# EAGLE board smart hub v2 (EAGLE 9.6.2)
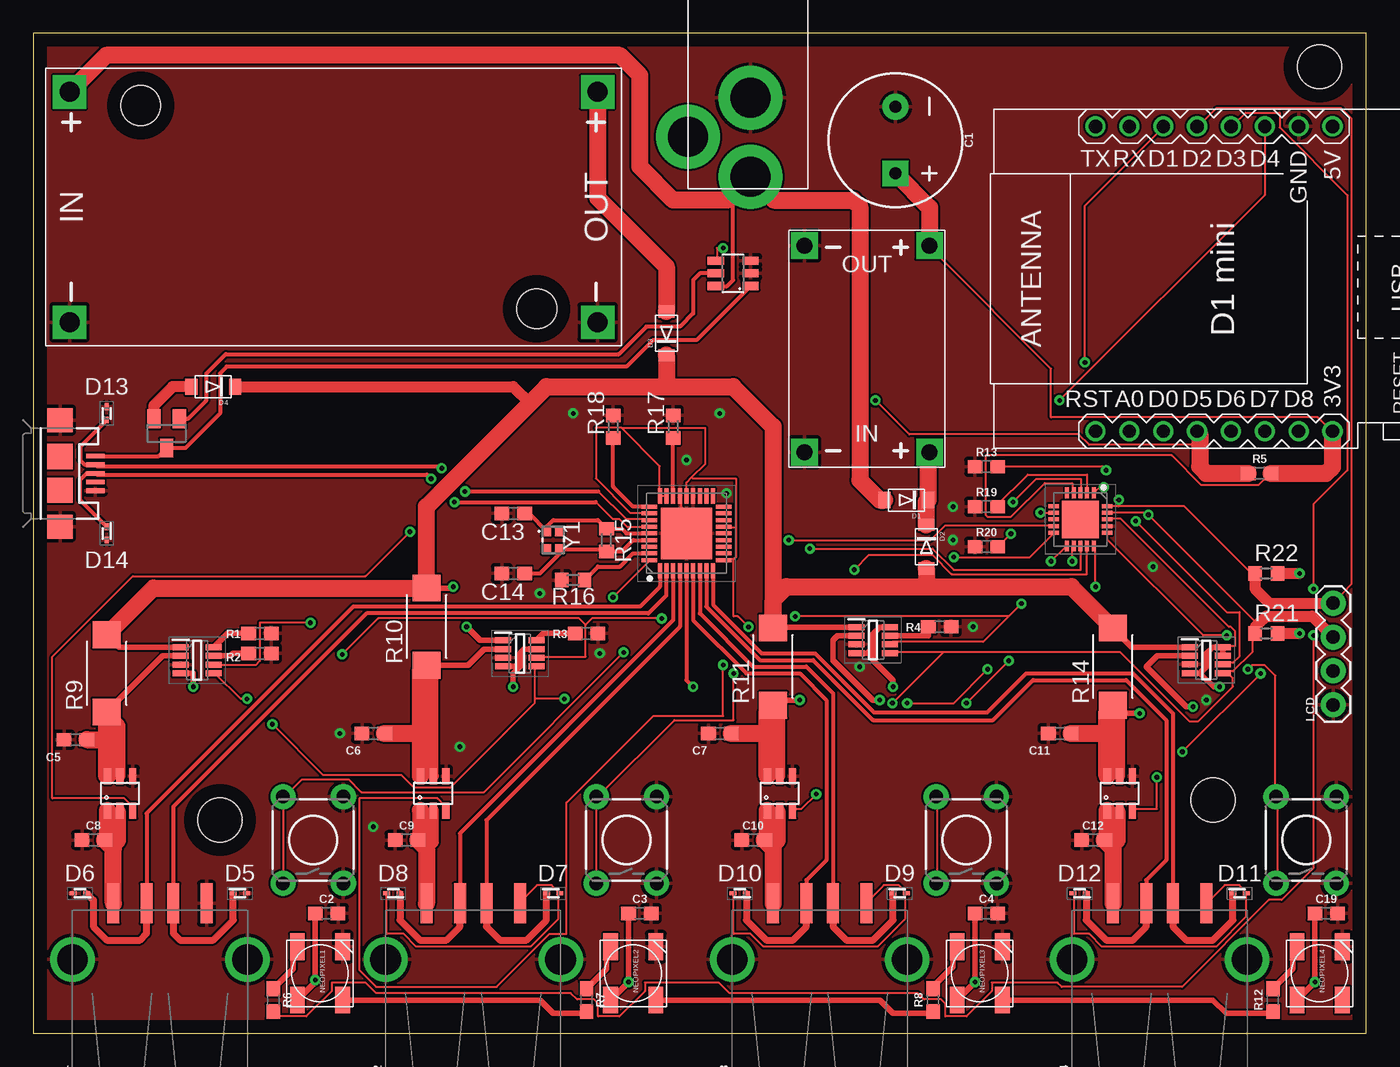
[diagram p0: board, top side]
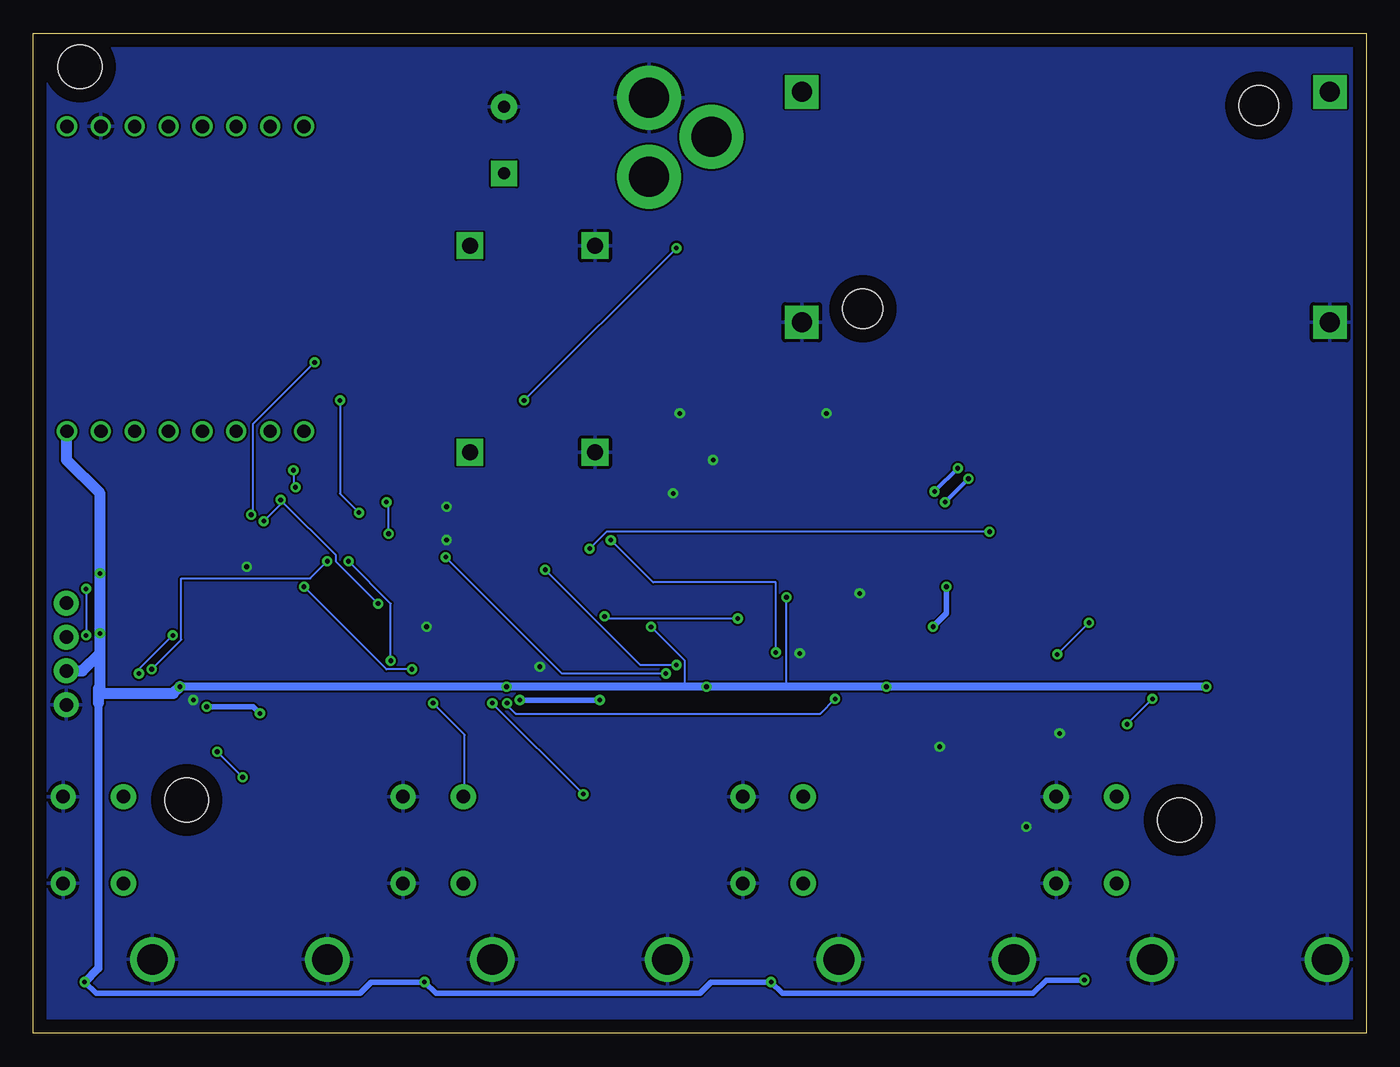
[diagram p1: board, bottom side, seen from below]

Size 100 x 75 mm. Coordinates in mm from the lower left corner, seen from the top.
Outline: 0,0 100,0 100,75 0,75 0,0
Copper layers (1*16): Top 0.035mm / dielectric 1.5mm / Bottom 0.035mm
Design rules "default": minimum track width 6mil, minimum drill 0.35mm, track to track 6mil, track to pad 6mil, pad to pad 6mil, via to via 6mil, smd to smd 6mil, copper to edge 40mil, drill to drill 6mil, minimum pad ring 10mil, minimum via ring 8mil, stop-mask expansion 4mil, vias tented up to drill 0mil, thermal gap 10mil
Holes 3.3 mm at 96.5,72.5 88.5,17.5 14,16

## Footprints (pad centres in the part's own frame; a part is rotated, then mirrored left to right if it is on the bottom)
CPOL-RADIAL-5MM-10MM-KIT = drill 0.9 pad 1.93 square: + 2.5,0 | drill 0.9 pad 1.93: - -2.5,0
0603 = smd 1.1 x 1: 1 -0.85,0; 2 0.85,0
C0603 = smd 1.1 x 1: 1 -0.85,0; 2 0.85,0
PJ-102A = drill 3 pad 4.8: RING 0.1,-3.39; RING_SW -4.6,-6.29; TIP 0.1,-9.29
SOD-123FL = smd 0.91 x 1.22: A 1.637,0; C -1.637,0
SODFL1006X40N = smd 0.51 x 0.32: 1 -0.5,0; 2 0.5,0
SOT65P280X145-8N = smd 1.2 x 0.45: 1 -1.25,0.975; 2 -1.25,0.325; 3 -1.25,-0.325; 4 -1.25,-0.975; 5 1.25,-0.975; 6 1.25,-0.325; 7 1.25,0.325; 8 1.25,0.975
QFN50P600X600X100-37N = smd 1.15 x 0.3: 1 -2.8,2; 2 -2.8,1.5; 3 -2.8,1; 4 -2.8,0.5; 5 -2.8,0; 6 -2.8,-0.5; 7 -2.8,-1; 8 -2.8,-1.5; 9 -2.8,-2; 19 2.8,-2; 20 2.8,-1.5; 21 2.8,-1; 22 2.8,-0.5; 23 2.8,0; 24 2.8,0.5; 25 2.8,1; 26 2.8,1.5; 27 2.8,2 | smd 0.3 x 1.15: 10 -2,-2.8; 11 -1.5,-2.8; 12 -1,-2.8; 13 -0.5,-2.8; 14 0,-2.8; 15 0.5,-2.8; 16 1,-2.8; 17 1.5,-2.8; 18 2,-2.8; 28 2,2.8; 29 1.5,2.8; 30 1,2.8; 31 0.5,2.8; 32 0,2.8; 33 -0.5,2.8; 34 -1,2.8; 35 -1.5,2.8; 36 -2,2.8 | smd 3.85 x 3.85: 37 0,0
QFN50P400X400X100-21N = smd 0.8 x 0.3: 1 -2,1; 2 -2,0.5; 3 -2,0; 4 -2,-0.5; 5 -2,-1; 11 2,-1; 12 2,-0.5; 13 2,0; 14 2,0.5; 15 2,1 | smd 0.3 x 0.8: 6 -1,-2; 7 -0.5,-2; 8 0,-2; 9 0.5,-2; 10 1,-2; 16 1,2; 17 0.5,2; 18 0,2; 19 -0.5,2; 20 -1,2 | smd 2.8 x 2.8: 21 0,0
USB-A-S-NOSILK-FEMALE = smd 3 x 0.9: D+ 6.752,-1; D- 6.752,1; GND 6.752,-3.5; VBUS 6.752,3.5 | drill 2.311: SHLD1 2.54,-6.566; SHLD2 2.54,6.566
1X04 = drill 1.016 pad 1.88: 1 0,0; 2 2.54,0; 3 5.08,0; 4 7.62,0
TSOT23-6 = smd 0.62 x 1.22: 1 -0.95,-1.3; 2 0,-1.3; 3 0.95,-1.3; 4 0.95,1.3; 5 0,1.3; 6 -0.95,1.3
SK6812 = smd 2 x 1.1: 1 -2,1.7; 2 -2,-1.7; 3 2,-1.7; 4 2,1.7
R2512W = smd 2 x 2.1: 1 -2.896,0; 2 2.896,0
R0603 = smd 1 x 1.1: 1 -0.85,0; 2 0.85,0
TACTILE-PTH = drill 1.016 pad 1.88: 1 -3.251,2.261; 2 3.251,2.261; 3 -3.251,-2.261; 4 3.251,-2.261
WEMOS-D1-MINI = drill 1: JP1.1 -11.43,9.525; JP1.2 -11.43,6.985; JP1.3 -11.43,4.445; JP1.4 -11.43,1.905; JP1.5 -11.43,-0.635; JP1.6 -11.43,-3.175; JP1.7 -11.43,-5.715; JP1.8 -11.43,-8.255; JP2.1 11.43,9.525; JP2.2 11.43,6.985; JP2.3 11.43,4.445; JP2.4 11.43,1.905; JP2.5 11.43,-0.635; JP2.6 11.43,-3.175; JP2.7 11.43,-5.715; JP2.8 11.43,-8.255
SOT23 = smd 1 x 1.4: 1 -0.95,-1.1; 2 0.95,-1.1; 3 0,1.1
SOT23-6 = smd 0.55 x 1.2: 1 -0.95,-1.3; 2 0,-1.3; 3 0.95,-1.3; 4 0.95,1.3; 5 0,1.3; 6 -0.95,1.3
DC-DC-STEP-DOWN-LM2596 = drill 1.5 pad 2.5 square: IN+ -19.812,8.636; IN- -19.812,-8.636; OUT+ 19.812,8.636; OUT- 19.812,-8.636 | hole 3: -14.478,7.62; 15.24,-7.62
DC-DC-STEP-DOWN-MP2307 = drill 1.2 pad 2 square: IN+ -7.747,-4.699; IN- -7.747,4.699; OUT+ 7.747,-4.699; OUT- 7.747,4.699
USB-MICROB = smd 0.35 x 1.4: D+ 0,2.65; D- -0.65,2.65; GND 1.3,2.65; ID 0.65,2.65; VBUS -1.3,2.65 | smd 1.8 x 1.9: MT1 -4,0; MT2 4,0 | smd 1.9 x 1.9: P$1 -1.27,0; P$2 1.27,0
XRCGB24 = smd 0.75 x 0.7: 1 -0.675,-0.5; 2 0.675,-0.5; 3 0.675,0.5; 4 -0.675,0.5

## Placement (x,y rotation side)
C1  1000uf  [CPOL-RADIAL-5MM-10MM-KIT]  64.69,66.99 270 top
C2  0.1uF  [0603]  22,9 0 top
C3  0.1uF  [0603]  45.5,9 0 top
C4  0.1uF  [0603]  71.5,9 0 top
C5  4.7uF  [0603]  3.16,22.02 180 top
C6  4.7uF  [0603]  25.5,22.5 180 top
C7  4.7uF  [0603]  51.5,22.5 180 top
C8  0.1uF  [0603]  4.5,14.5 0 top
C9  0.1uF  [0603]  28,14.5 0 top
C10  0.1uF  [0603]  54,14.5 0 top
C11  4.7uF  [0603]  77,22.5 180 top
C12  0.1uF  [0603]  79.5,14.5 0 top
C13  18p  [C0603]  36,39 180 top
C14  18p  [C0603]  36,34.5 180 top
C19  0.1uF  [0603]  97,9 0 top
CN1  2.1MMJACKTHM  [PJ-102A]  53.71,73.54 0 top
D1  [SOD-123FL]  65.5,40 180 top
D2  [SOD-123FL]  67,36.5 270 top
D3  [SOD-123FL]  47.5,52.5 90 top
D4  [SOD-123FL]  13.5,48.5 180 top
D5  ESD9B  [SODFL1006X40N]  15.5,10.5 0 top
D6  ESD9B  [SODFL1006X40N]  3.5,10.5 180 top
D7  ESD9B  [SODFL1006X40N]  39,10.5 0 top
D8  ESD9B  [SODFL1006X40N]  27,10.5 180 top
D9  ESD9B  [SODFL1006X40N]  65,10.5 0 top
D10  ESD9B  [SODFL1006X40N]  53,10.5 180 top
D11  ESD9B  [SODFL1006X40N]  90.5,10.5 0 top
D12  ESD9B  [SODFL1006X40N]  78.5,10.5 180 top
D13  ESD9B3.3ST5G  [SODFL1006X40N]  5.5,46.5 90 top
D14  ESD9B3.3ST5G  [SODFL1006X40N]  5.5,37.5 270 top
IC1  INA219B  [SOT65P280X145-8N]  12.29,27.98 0 top
IC2  INA219B  [SOT65P280X145-8N]  36.5,28.5 0 top
IC3  INA219B  [SOT65P280X145-8N]  63,29.5 0 top
IC4  INA219B  [SOT65P280X145-8N]  88,28 0 top
IC5  USB2514B  [QFN50P600X600X100-37N]  49,37.5 90 top
IC6  MCP23008  [QFN50P400X400X100-21N]  78.55,38.54 270 top
J1  USB_A_SMT_FEMALE_NS  [USB-A-S-NOSILK-FEMALE]  9.5,3 90 top
J2  USB_A_SMT_FEMALE_NS  [USB-A-S-NOSILK-FEMALE]  33,3 90 top
J3  USB_A_SMT_FEMALE_NS  [USB-A-S-NOSILK-FEMALE]  59,3 90 top
J4  USB_A_SMT_FEMALE_NS  [USB-A-S-NOSILK-FEMALE]  84.5,3 90 top
LCD  [1X04]  97.52,24.64 90 top
LTC4412  LTC4412  [TSOT23-6]  52.5,57 90 top
NEOPIXEL1  SK6812NEOPIXEL5050  [SK6812]  21.5,4.5 90 top
NEOPIXEL2  SK6812NEOPIXEL5050  [SK6812]  45,4.5 90 top
NEOPIXEL3  SK6812NEOPIXEL5050  [SK6812]  71,4.5 90 top
NEOPIXEL4  SK6812NEOPIXEL5050  [SK6812]  96.5,4.5 90 top
R1  10k  [0603]  17,30 180 top
R2  10k  [0603]  17,28.5 180 top
R3  10k  [0603]  41.5,30 180 top
R4  10k  [0603]  68,30.5 180 top
R5  470k  [0603]  92,42 0 top
R6  470  [0603]  18,2.5 270 top
R7  27  [0603]  41.5,2.5 270 top
R8  27  [0603]  67.5,2.5 90 top
R9  0.1ohm 1% 2W  [R2512W]  5.5,27 90 top
R10  0.1ohm 1% 2W  [R2512W]  29.5,30.5 90 top
R11  0.1ohm 1% 2W  [R2512W]  55.5,27.5 90 top
R12  27  [0603]  93,2.5 90 top
R13  10k  [0603]  71.5,42.5 0 top
R14  0.1ohm 1% 2W  [R2512W]  81,27.5 90 top
R15  1M  [R0603]  43,37 270 top
R16  12k  [R0603]  40.5,34 0 top
R17  56k  [R0603]  48,45.5 90 top
R18  56k  [R0603]  43.5,45.5 90 top
R19  10k  [0603]  71.5,39.5 0 top
R20  10k  [0603]  71.5,36.5 0 top
R21  4.7k  [R0603]  92.5,30 0 top
R22  4.7k  [R0603]  92.5,34.5 0 top
S1  [TACTILE-PTH]  21,14.5 90 top
S2  [TACTILE-PTH]  44.5,14.5 90 top
S3  [TACTILE-PTH]  70,14.5 90 top
S4  [TACTILE-PTH]  95.5,14.5 90 top
U$1  WEMOS-D1-MINI  [WEMOS-D1-MINI]  89.22,56.59 90 top
U$2  SQ2303ES  [SOT23]  10,45 180 top
U$3  SIP32508  [SOT23-6]  6.5,18 0 top
U$4  SIP32508  [SOT23-6]  30,18 0 top
U$5  SIP32508  [SOT23-6]  56,18 0 top
U$6  LM2596  [DC-DC-STEP-DOWN-LM2596]  22.53,61.97 0 top
U$7  mini-360  [DC-DC-STEP-DOWN-MP2307]  62.55,51.33 90 top
U$8  SIP32508  [SOT23-6]  81.5,18 0 top
USBIN  USB-MICROB  [USB-MICROB]  2,42 270 top
Y1  XRCGB24M000F0L00R0  [XRCGB24]  39,37 270 top

## Library data of the parts
C1 = SparkFun-Capacitors; PROD_ID: CAP-09538
C2-C4 C19 = SparkFun-Capacitors; PROD_ID: CAP-08604
C5-C7 C11 = SparkFun-Capacitors; PROD_ID: CAP-08280
C8-C10 C12 = SparkFun-Capacitors; PROD_ID: CAP-00810
C13 C14 CN1 D1-D4 R9-R11 R14 R21 R22 = adafruit
D5-D14 = SamacSys_Parts; ARROW_PART_NUMBER: ESD9B3.3ST5G; ARROW_PRICE-STOCK: https://www.arrow.com/en/products/esd9b3.3st5g/on-semiconductor; DESCRIPTION: TVS ESD Suppressor 18KV SOD-923 ON Semiconductor ESD9B3.3ST5G Bi-Directional TVS Diode, 300mW peak, 2-Pin SOD-923; HEIGHT: 0.4mm; MANUFACTURER_NAME: ON Semiconductor; MANUFACTURER_PART_NUMBER: ESD9B3.3ST5G; MOUSER_PART_NUMBER: 863-ESD9B3.3ST5G; MOUSER_PRICE-STOCK: https://www.mouser.co.uk/ProductDetail/ON-Semiconductor/ESD9B33ST5G?qs=yU2N9dt%252BrfmXrPf3vhgUEA%3D%3D
IC1-IC4 = INA219BIDCNT; ARROW_PART_NUMBER: INA219BIDCNT; ARROW_PRICE-STOCK: https://www.arrow.com/en/products/ina219bidcnt/texas-instruments; DESCRIPTION: INA219BIDCNT, Intelligent Power Switch High Side Current Shunt, Power Monitor, 0.01A, 5.5V, 8-Pin, SOT-23; HEIGHT: 1.45mm; MANUFACTURER_NAME: Texas Instruments; MANUFACTURER_PART_NUMBER: INA219BIDCNT; MOUSER_PART_NUMBER: 595-INA219BIDCNT; MOUSER_PRICE-STOCK: https://www.mouser.co.uk/ProductDetail/Texas-Instruments/INA219BIDCNT?qs=1WmUhT%2FVMIMmEKxVjzYikA%3D%3D
IC5 = SamacSys_Parts; ARROW_PART_NUMBER: USB2514B-AEZC; ARROW_PRICE-STOCK: https://www.arrow.com/en/products/usb2514b-aezc/microchip-technology; DESCRIPTION: USB 2.0 Hub Controller 4-Port BC QFN36 Microchip USB2514B-AEZC, USB Controller, 480MBps, USB 2.0, 3.3 V, 36-Pin QFN; HEIGHT: 1mm; MANUFACTURER_NAME: Microchip; MANUFACTURER_PART_NUMBER: USB2514B-AEZC; MOUSER_PART_NUMBER: 886-USB2514B-AEZC; MOUSER_PRICE-STOCK: https://www.mouser.co.uk/ProductDetail/Microchip-Technology/USB2514B-AEZC?qs=pA5MXup5wxGEnK1%2F4ENYlA%3D%3D
IC6 = SamacSys_Parts; ARROW_PART_NUMBER: MCP23008-E/ML; ARROW_PRICE-STOCK: https://www.arrow.com/en/products/mcp23008-eml/microchip-technology; DESCRIPTION: 8-Bit I/O Port Expander I2C 1.7M QFN20EP Microchip MCP23008-E/ML, 8-channel 8bit I/O Expander 1.7MHz, I2C, 20-Pin QFN; HEIGHT: 1mm; MANUFACTURER_NAME: Microchip; MANUFACTURER_PART_NUMBER: MCP23008-E/ML; MOUSER_PART_NUMBER: 579-MCP23008-E/ML; MOUSER_PRICE-STOCK: https://www.mouser.co.uk/ProductDetail/Microchip-Technology/MCP23008-E-ML?qs=usxtMOJb1Rw9YcrGR8Z%252BbQ%3D%3D
J1-J4 = SparkFun-Connectors; PROD_ID: CONN-09520; SF_ID: PRT-09011
LCD = SparkFun-Connectors; PROD_ID: CONN-09696
LTC4412 NEOPIXEL1-NEOPIXEL4 U$2-U$5 U$8 = custom parts
R1-R4 R13 R19 R20 = SparkFun-Resistors; PROD_ID: RES-00824
R5 = SparkFun-Resistors; PROD_ID: RES-07858
R6-R8 R12 = SparkFun-Resistors; PROD_ID: RES-07869
R15 = resistor
R16-R18 = rcl; SPICEPREFIX: R
S1-S4 = SparkFun-Retired
U$1 U$6 U$7 = diy-modules
USBIN = SparkFun-Retired; PROD_ID: CONN-09505
Y1 = SamacSys_Parts; ARROW_PART_NUMBER: XRCGB24M000F0L00R0; ARROW_PRICE-STOCK: https://www.arrow.com/en/products/xrcgb24m000f0l00r0/murata-manufacturing; DESCRIPTION: Murata 24MHz Crystal +/-100ppm SMD 4-Pin 2 x 1.6 x 0.7mm; HEIGHT: mm; MANUFACTURER_NAME: Murata Electronics; MANUFACTURER_PART_NUMBER: XRCGB24M000F0L00R0; MOUSER_PART_NUMBER: 81-XRCGB24M000F0L0R0; MOUSER_PRICE-STOCK: https://www.mouser.com/Search/Refine.aspx?Keyword=81-XRCGB24M000F0L0R0

## Nets
1+: D5.1 IC5.2 J1.D+
1-: D6.1 IC5.1 J1.D-
2+: D7.1 IC5.4 J2.D+
2-: D8.1 IC5.3 J2.D-
3+: D9.1 IC5.7 J3.D+
3-: D10.1 IC5.6 J3.D-
3.3V: C1.+ C2.1 C3.1 C4.1 C19.1 IC1.4 IC2.4 IC2.7 IC3.4 IC3.8 IC4.4 IC4.7 IC4.8 IC5.5 IC5.10 IC5.15 IC5.23 IC5.26 IC5.27 IC5.29 IC5.36 IC6.4 IC6.18 LCD.2 NEOPIXEL1.1 NEOPIXEL2.1 NEOPIXEL3.1 NEOPIXEL4.1 R5.2 R21.2 R22.2 U$1.JP1.8 U$7.OUT+
4+: D11.1 IC5.9 J4.D+
4-: D12.1 IC5.8 J4.D-
5V: U$1.JP2.8
BUTTON1: IC6.9 S1.1 S1.2
BUTTON2: IC6.10 S2.1 S2.2
BUTTON3: IC6.11 S3.1 S3.2
BUTTON4: IC6.12 S4.1 S4.2
D_IN+: D14.1 IC5.31 USBIN.D+
D_IN-: D13.1 IC5.30 USBIN.D-
EN1: IC6.13 U$3.3
EN2: IC6.14 U$4.3
EN3: IC6.15 U$5.3
EN4: IC6.16 U$8.3
GND: C1.- C2.2 C3.2 C4.2 C5.2 C6.2 C7.2 C8.1 C9.1 C10.1 C11.2 C12.1 C13.2 C14.2 C19.2 CN1.RING D5.2 D6.2 D13.2 D14.2 IC1.3 IC2.3 IC3.3 IC4.3 IC5.22 IC5.24 IC5.37 IC6.17 J1.GND J1.SHLD1 J1.SHLD2 J2.SHLD1 J2.SHLD2 J3.SHLD1 J3.SHLD2 J4.SHLD1 J4.SHLD2 LCD.1 LTC4412.2 LTC4412.3 NEOPIXEL1.3 NEOPIXEL2.3 NEOPIXEL3.3 NEOPIXEL4.3 R1.1 R2.1 R3.1 R4.1 R13.1 R16.1 R17.2 R18.2 R19.1 R20.1 S1.3 S1.4 S2.3 S2.4 S3.3 S3.4 S4.3 S4.4 U$1.JP2.7 U$3.4 U$4.4 U$5.4 U$6.IN- U$6.OUT- U$7.IN- U$7.OUT- U$8.4 USBIN.GND USBIN.MT1 USBIN.MT2
GND1: D7.2 D8.2 J2.GND
GND2: D9.2 D10.2 J3.GND
GND3: D11.2 D12.2 J4.GND
INTERUPT: IC6.7 U$1.JP2.6
N$1: CN1.TIP D1.A LTC4412.6 U$6.IN+
N$2: D1.C D2.C U$7.IN+
N$3: D4.A U$2.2
N$4: D3.A U$6.OUT+
N$5: LTC4412.5 U$2.1
N$6: NEOPIXEL2.4 R7.1
N$7: LTC4412.1 U$2.3 USBIN.VBUS
N$8: NEOPIXEL3.4 R8.2
N$9: NEOPIXEL1.2 R7.2
N$10: NEOPIXEL2.2 R8.1
N$11: C5.1 IC1.2 R9.1 U$3.5 U$3.6
N$12: C6.1 IC2.2 R10.1 U$4.5 U$4.6
N$13: IC3.7 R4.2
N$14: IC2.8 R3.2
N$15: IC1.8 R1.2
N$16: IC1.7 R2.2
N$17: NEOPIXEL1.4 R6.1
N$18: NEOPIXEL4.4 R12.2
N$19: C7.1 IC3.2 R11.1 U$5.5 U$5.6
N$20: NEOPIXEL3.2 R12.1
N$21: C10.2 J3.VBUS U$5.1 U$5.2
N$22: C9.2 J2.VBUS U$4.1 U$4.2
N$23: IC6.1 R13.2
N$24: IC6.2 R19.2
N$25: C11.1 IC4.2 R14.1 U$8.5 U$8.6
N$26: C12.2 J4.VBUS U$8.1 U$8.2
N$35: C13.1 IC5.32 R15.1 Y1.1
N$36: C14.1 IC5.33 R15.2 Y1.3
N$37: IC5.25 R17.1
N$38: IC5.28 R18.1
N$39: IC5.35 R16.2
N$40: IC6.3 R20.2
N$41: C8.2 J1.VBUS U$3.1 U$3.2
NEOPIXEL: R6.2 U$1.JP2.5
POWER_SENSE: LTC4412.4 R5.1 U$1.JP1.4
SCL: IC1.5 IC2.5 IC3.5 IC4.5 IC6.19 LCD.3 R21.1 U$1.JP2.3
SDA: IC1.6 IC2.6 IC3.6 IC4.6 IC6.20 LCD.4 R22.1 U$1.JP2.4
USB_SUPPLY: D2.A D3.C D4.C IC1.1 IC2.1 IC3.1 IC4.1 R9.2 R10.2 R11.2 R14.2

## Tracks (layer width: path | path; a pad name or v marks a point on that pad's centre or on a via)
1+
  Top 0.305: J1.D+ 10.5,17 25,31.5 46.15,31.5 47.5,32.85 IC5.2
  Top 0.508: J1.D+ 10.5,7.5 11,7 13.5,7 15,8.5 D5.1
1-
  Top 0.305: IC5.1 47,33.5 45.5,32 24,32 8.5,16.5 8.5,9
  Top 0.508: D6.1 4.5,10 4.5,8 5.5,7 8,7 8.5,7.5 8.5,9 J1.D-
2+
  Top 0.305: IC5.4 48.5,30.5 34,16 34,9.5
  Top 0.508: J2.D+ 34,9.5 34,8 35,7 37,7 38.5,8.5 D7.1
2-
  Top 0.305: IC5.3 48,31 32,15 32,9.5
  Top 0.508: D8.1 27.5,8.5 29,7 31,7 32,8 32,9.5 J2.D-
3+
  Top 0.305: IC5.7 50,31.5 54,27.5 58,27.5 60,25.5 J3.D+
  Top 0.508: J3.D+ 60,8 61,7 63,7 64.5,8.5 D9.1
3-
  Top 0.305: IC5.6 49.5,31 53.5,27 57.5,27 59.5,25 59.5,13 58,11.5 58,9
  Top 0.508: D10.1 53.5,8.5 55,7 57,7 58,8 58,9 J3.D-
3.3V  (via drill 0.35)
  Top 0.152: 52.55,35.56 51.91,35.56 IC5.10 | 52.55,35.56 52.7,35.72 52.7,37.94 | 52.7,37.94 51.91,37.94 IC5.15 | 44.13,45.4 42.2,45.4 42.2,41.62 44.77,39.05 46.2,39.05 IC5.29 | 44.13,45.4 46.99,42.55 46.99,40.32 IC5.27 47.15,40.32 47.47,40.32 IC5.26 | 49.4,41.7 50.4,42.7 50.4,45.4 44.13,45.4 | 49.4,41.7 49,41.3 IC5.23 | 52.7,37.94 52.7,41.62 49.47,41.62 49.4,41.7 | IC6.18 80.64,38.58 81.6,38.58 89.69,30.48 89.85,30.48 90.17,30.16 90.17,29.05 89.38,29.05 IC4.8 | IC6.4 77.95,40.64 77.95,41.27 75.88,41.27 73.34,38.73 71.6,38.73 71.44,38.89 71.44,43.34 85.41,43.34 87.63,41.12 91.92,41.12 92.39,41.59 R5.2 | v43.5,32.7 46.2,35.4 IC5.36 | U$7.OUT+ 67.63,58.58 76.36,49.85 76.36,46.2 96.36,46.2 97,45.56 U$1.JP1.8 | 52.55,35.56 52.55,31.27 52.86,31.27 v53.66,30.48
  Top 0.305: IC5.5 49,26.5 v49.5,26
  Top 0.406: C2.1 v21.15,4 21.15,3.85 NEOPIXEL1.1 | NEOPIXEL2.1 v44.65,3.85 C3.1 | NEOPIXEL3.1 v70.65,3.85 C4.1 | NEOPIXEL4.1 v96.15,3.85 C19.1 | IC4.4 87.53,27.02 | 87.53,27.02 88,27.5 88,28.5 88.47,28.98 IC4.8 IC4.7 | IC3.4 62.52,28.52 63,29 | IC3.8 63.5,30.48 63,29.98 63,29 | IC2.7 36.83,28.82 36.5,28.5 36.5,27.5 | 36.5,27.5 36,27 v36,26 | IC2.4 36.52,27.52 36.5,27.5 | IC1.4 12,27 v12,26 | 63,29 63,28 64.5,26.5 v64.5,26 | 87.53,27.02 88.55,26 v89,26
  Top 0.813: R21.2 v95,30 | R22.2 v95,34.5
  Top 1.27: C1.+ 67.25,61.93 U$7.OUT+ | R5.2 97,42 97.47,42.48 U$1.JP1.8
  Bottom 0.152: 43.5,26 v43.5,32.7 | v53.66,30.48 51.12,27.94 51.12,26
  Bottom 0.406: v21.15,4 24,4 25,3 43.8,3 v44.65,3.85 49.15,3.85 50,3 69.8,3 v70.65,3.85 74.65,3.85 75.5,3 95.3,3 v96.15,3.85
  Bottom 0.61: v12,26 v36,26 43.5,26 v49.5,26 51.12,26 v64.5,26 v89,26 | 95.12,24.78 95.12,4.88 v96.15,3.85
  Bottom 0.813: LCD.2 96.32,27.18 95,28.5 | 95,28.5 v95,30 v95,34.5 95,40.5 97.5,43 97.5,45.13 U$1.JP1.8 | v89,26 89.5,25.5 95,25.5 95,26 | 95,26 95,28.5 | 95,26 95.12,25.88 95.12,24.78
4+
  Top 0.305: IC5.9 51,32.15 54.65,28.5 58.65,28.5 63.07,24.07 71.57,24.07 74.5,27 82.5,27 85.5,24 J4.D+
  Top 0.508: J4.D+ 85.5,8 86.5,7 88.5,7 90,8.5 D11.1
4-
  Top 0.305: J4.D- 83.5,11.5 85,13 85,23.5 82,26.5 75,26.5 72,23.5 63,23.5 58.5,28 54.5,28 50.5,32 IC5.8
  Top 0.508: J4.D- 83.5,8 82.5,7 80.5,7 79,8.5 D12.1
BUTTON1  (via drill 0.35)
  Top 0.152: v56.67,36.99 67.31,36.99 68.42,38.1 76.52,38.1 IC6.9 | v44.29,28.57 33.81,18.1 24.61,18.1 23.65,19.05 20.16,19.05 18.89,17.78 S1.2 18.73,17.62 18.73,11.27 S1.1
  Bottom 0.152: v56.67,36.99 53.5,33.81 44.29,33.81 v44.29,28.57
BUTTON2  (via drill 0.35)
  Top 0.152: v69.06,35.72 74.77,35.72 76.52,37.47 IC6.10 | v52.55,26.99 52.55,23.5 48.1,23.5 42.39,17.78 S2.2 42.23,17.62 42.23,11.27 S2.1
  Bottom 0.152: v69.06,35.72 60.33,26.99 v52.55,26.99
BUTTON3  (via drill 0.35)
  Top 0.152: v76.36,35.4 77.47,36.51 IC6.11 | v70.01,24.77 v73.18,27.94 | S3.1 67.79,11.27 67.79,17.62 S3.2
  Bottom 0.152: v76.36,35.4 73.18,32.23 v73.18,27.94 | v70.01,24.77 67.63,22.38 67.63,17.78 S3.2
BUTTON4  (via drill 0.35)
  Top 0.152: v77.95,35.4 77.95,36.51 IC6.12 | v91.12,27.3 91.44,27.62 92.39,27.62 93.19,26.83 93.19,17.78 S4.2 93.34,17.62 93.34,11.27 S4.1
  Bottom 0.152: v77.95,35.4 79.22,34.13 88.9,34.13 88.9,29.53 v91.12,27.3
D_IN+  (via drill 0.35)
  Top 0.152: 4.76,41.91 USBIN.D+ | 42.2,39.85 43.47,38.58 43.96,38.58 44.54,38 IC5.31
  Top 0.305: D14.1 3.5,40 3.5,41.51 3.99,42 USBIN.D+ | v31.59,39.85 42.2,39.85 | v29.84,41.59 29.53,41.91 4.76,41.91
  Bottom 0.305: v29.84,41.59 v31.59,39.85
D_IN-  (via drill 0.35)
  Top 0.152: 42.39,40.64 44.45,38.58 46.2,38.58 IC5.30 | 4.76,42.55 USBIN.D-
  Top 0.305: D13.1 3.5,44 3.5,43 3.85,42.65 USBIN.D- | v32.38,40.64 42.39,40.64 | v30.64,42.39 30.48,42.55 4.76,42.55
  Bottom 0.305: v30.64,42.39 v32.38,40.64
EN1  (via drill 0.35)
  Top 0.152: v58.26,36.35 67.47,36.35 69.06,34.77 78.58,34.77 78.58,36.51 IC6.13 | v28.26,37.62 24.92,34.29 7.46,34.29 1.43,28.26 1.43,17.62 6.83,17.62 7.3,17.14 7.3,16.83 U$3.3
  Bottom 0.152: v58.26,36.35 56.99,37.62 v28.26,37.62
EN2  (via drill 0.35)
  Top 0.152: v61.59,34.77 62.71,35.88 67.47,35.88 68.9,34.45 79.06,34.45 79.06,36.51 IC6.14 | v51.75,27.62 51.75,23.81 46.51,23.81 40.01,17.3 40.01,7.46 38.73,7.46 34.77,3.49 25.72,3.49 24.45,4.76 24.45,17.62 30.32,17.62 30.8,17.14 30.8,16.83 U$4.3
  Bottom 0.152: v61.59,34.77 54.45,27.62 v51.75,27.62
EN3  (via drill 0.35)
  Top 0.152: v79.69,33.5 79.69,36.51 IC6.15 | v71.6,27.3 69.06,24.77 v65.56,24.77 | v58.74,17.94 57.63,16.83 56.99,16.83 U$5.3
  Bottom 0.152: v79.69,33.5 73.5,27.3 v71.6,27.3 | v58.74,17.94 v65.56,24.77
EN4  (via drill 0.35)
  Top 0.152: IC6.16 80.55,37.06 87.77,29.84 v89.53,29.84 | v86.2,21.11 v92.08,26.99 | v84.3,19.21 84.3,16.83 82.55,16.83 U$8.3
  Bottom 0.152: v89.53,29.84 92.08,27.3 v92.08,26.99 | v84.3,19.21 v86.2,21.11
GND  (via drill 0.35)
  Top 0.152: IC5.37 48.9,37.62 48.9,39.37 48.74,39.37 48.58,39.53 48.58,40.16 IC5.24 | IC3.3 61.75,29.21 61.7,29.22
  other vias: 40.5,46.5 51.5,46.5 84,35 88,25 69,39.5 49,43 25.5,15.5 32,21.5 23,22.5 69,37 70.5,30.5 38,33 42.5,28.5 52,40.5 62,27.5
  pour Top: 0,75 0,0 100,0 100,75
  pour Bottom: 0,75 0,0 100,0 100,75
GND1
  Top 0.152: D8.2 26.51,10.48 26.51,7.46 27.78,7.46 28.73,6.51 37.31,6.51 39.37,8.57 39.37,10.48 D7.2 39.37,10.64 38.89,11.11 37.78,11.11 36.51,9.84 J2.GND
GND2
  Top 0.152: D10.2 52.55,10.48 52.55,7.46 53.82,7.46 54.77,6.51 63.34,6.51 65.41,8.57 65.41,10.48 D9.2 65.41,10.64 64.93,11.11 63.82,11.11 62.55,9.84 J3.GND
GND3
  Top 0.152: D12.2 78.11,10.48 78.11,7.46 79.22,7.46 80.17,6.51 88.74,6.51 90.96,8.73 90.96,10.48 D11.2 90.96,10.64 90.49,11.11 89.38,11.11 88.11,9.84 J4.GND
INTERUPT  (via drill 0.35)
  Top 0.152: v75.56,39.05 76.52,39.05 IC6.7 | v76.99,47.47 92.39,62.87 92.39,67.94 U$1.JP2.6
  Bottom 0.152: v75.56,39.05 76.99,40.48 v76.99,47.47
N$1
  Top 0.305: LTC4412.6 52.05,56.05 52.5,56.5 52.5,62.94 CN1.TIP
  Top 1.27: U$6.IN+ 5.46,73.35 44,73.35 45.5,71.85 45.5,65 48,62.5 52.06,62.5 CN1.TIP 55.56,62.5 61.5,62.5 62,62 62,41.5 63.5,40 D1.A
N$2
  Top 1.27: U$7.IN+ 67.14,43.47 D1.C 67,39.86 D2.C
N$3
  Top 0.813: D4.A 10.45,48.5 9.05,47.1 U$2.2
N$4
  Top 1.27: U$6.OUT+ 42.34,62.66 47.5,57.5 D3.A
N$5
  Top 0.305: LTC4412.5 50,57 49.5,56.5 49.5,54 48.5,53 46,53 43.94,50.94 14.44,50.94 13,49.5 13,47.5 11.6,46.1 U$2.1
N$6
  Top 0.406: R7.1 43,4.85 43,6.2 NEOPIXEL2.4
N$7
  Top 0.305: USBIN.VBUS 9.4,43.3 U$2.3 11.4,43.9 14,46.5 14,49.5 14.5,50 44.5,50 46.5,52 49.75,52 LTC4412.1
N$8
  Top 0.406: R8.2 67.5,3.5 69,5 69,6.2 NEOPIXEL3.4
N$9
  Top 0.406: NEOPIXEL1.2 38,2.5 39,1.5 41.35,1.5 R7.2
N$10
  Top 0.406: NEOPIXEL2.2 63.5,2.5 64.5,1.5 67.35,1.5 R8.1
N$11
  Top 0.406: R9.1 9.7,28.3 IC1.2
  Top 0.813: R9.1 6.5,23.1 U$3.5
  Top 1.27: U$3.6 5.5,19.35 5.5,22 | 5.5,22 R9.1 | C5.1 5.48,22.02 5.5,22
N$12
  Top 0.406: R10.1 32.6,27.6 33.83,28.82 IC2.2
  Top 0.813: R10.1 30,27.1 U$4.5
  Top 1.27: U$4.6 29.05,22.5 | 29.05,22.5 29.05,27.15 R10.1 | C6.1 29.05,22.5
N$13
  Top 0.406: IC3.7 67.15,29.82 R4.2
N$14
  Top 0.406: IC2.8 38.27,30 R3.2
N$15
  Top 0.406: IC1.8 14.59,30 R1.2
N$16
  Top 0.406: IC1.7 14.8,28.3 15,28.5 R2.2
N$17
  Top 0.406: R6.1 19.5,4.85 19.5,6.2 NEOPIXEL1.4
N$18
  Top 0.406: R12.2 94.5,4.85 94.5,6.2 NEOPIXEL4.4
N$19  (via drill 0.35)
  Top 0.406: IC3.2 60.33,29.82 60,29.5 60,28 63,25 v63.5,25 | v57.5,25 55.9,25 R11.1
  Top 0.813: R11.1 56,24.1 U$5.5
  Top 1.27: U$5.6 55.05,22.5 | 55.05,22.5 55.05,24.15 R11.1 | C7.1 55.05,22.5
  Bottom 0.406: v63.5,25 v57.5,25
N$20
  Top 0.406: NEOPIXEL3.2 88.5,2.5 89.5,1.5 92.85,1.5 R12.1
N$21
  Top 0.813: U$5.2 56,14.35 55.5,13.85
  Top 1.27: J3.VBUS 55.5,13.85 C10.2 55.05,14.7 U$5.1
N$22
  Top 0.813: U$4.2 30,14.35 29.5,13.85
  Top 1.27: J2.VBUS 29.5,13.85 C9.2 29.05,14.7 U$4.1
N$23  (via drill 0.35)
  Top 0.152: v80.33,40.96 80.01,40.96 79.69,40.64 IC6.1 | v80.49,42.23 80.17,42.55 72.39,42.55 R13.2
  Bottom 0.152: v80.33,40.96 80.49,41.12 v80.49,42.23
N$24
  Top 0.152: IC6.2 79.06,40.64 79.06,41.91 74.61,41.91 72.23,39.53 R19.2
N$25  (via drill 0.35)
  Top 0.406: IC4.2 84.33,28.32 83.5,27.5 86.5,24.5 v87,24.5 | v83,24 81.6,24 R14.1
  Top 0.813: R14.1 81.5,24.1 U$8.5
  Top 1.27: U$8.6 80.55,22.5 | 80.55,22.5 80.55,24.15 R14.1 | C11.1 80.55,22.5
  Bottom 0.406: v87,24.5 83.5,24.5 v83,24
N$26
  Top 0.813: U$8.2 81.5,14.35 81,13.85
  Top 1.27: J4.VBUS 81,13.85 C12.2 80.55,14.7 U$8.1
N$35
  Top 0.305: IC5.32 44.5,37.5 44.15,37.85 R15.1 42.35,38.5 39,38.5 38.5,38 Y1.1 37.17,39 C13.1
N$36
  Top 0.305: IC5.33 45,37 44.15,36.15 R15.2 42.83,36.33 Y1.3 39.5,36 38,34.5 C14.1
N$37
  Top 0.305: IC5.25 R17.1
N$38
  Top 0.305: IC5.28 45,39.5 43.5,41 R18.1
N$39
  Top 0.305: R16.2 42.35,35 44,35 45,36 IC5.35
N$40  (via drill 0.35)
  Top 0.152: v73.5,39.85 75.25,41.59 78.58,41.59 78.58,40.64 IC6.3 | v73.34,37.47 72.39,36.51 R20.2
  Bottom 0.152: v73.5,39.85 73.34,39.69 v73.34,37.47
N$41
  Top 0.813: U$3.2 6.5,14.35 6,13.85
  Top 1.27: J1.VBUS 6,13.85 C8.2 5.55,14.7 U$3.1
NEOPIXEL  (via drill 0.35)
  Top 0.152: v96.04,29.84 96.04,12.38 93.66,10 92.71,10 86.2,3.49 77.15,3.49 76.83,3.81 71.91,3.81 71.91,3.17 70.01,1.27 68.42,1.27 68.42,2.22 68.1,2.54 66.83,2.54 66.36,3.02 52.23,3.02 51.44,3.81 45.88,3.81 45.88,3.17 43.97,1.27 42.39,1.27 42.39,2.22 42.07,2.54 40.8,2.54 40.32,3.02 25.72,3.02 24.92,3.81 22.38,3.81 22.38,3.17 20.48,1.27 18.41,1.27 18.1,1.59 R6.2 | v96.04,33.34 96.04,39.69 98.58,42.23 98.58,62.87 93.5,67.94 93.5,69.06 90.96,69.06 90.01,68.1 U$1.JP2.5
  Bottom 0.152: v96.04,33.34 v96.04,29.84
POWER_SENSE  (via drill 0.35)
  Top 0.152: v51.75,58.9 51.28,58.9 51.28,58.1 LTC4412.4 | v63.18,47.47 65.72,44.93 78.42,44.93 79.22,44.13 87.5,44.13
  Top 1.27: U$1.JP1.4 87.5,44.98 87.5,44.13 87.5,42.5 88,42 R5.1
  Bottom 0.152: v63.18,47.47 v51.75,58.9
SCL  (via drill 0.35)
  Top 0.152: v16.03,25.08 15.56,25.08 13.65,26.99 IC1.5 | v17.94,23.18 21.75,19.37 27.62,19.37 28.57,18.41 31.27,18.41 37.62,24.77 37.62,25.08 | 37.62,25.08 37.62,27.46 IC2.5 | 91.88,30.68 v83.66,38.89 83.5,39.05 80.64,39.05 IC6.19 | 89.5,27.15 90.01,27.15 91.44,28.57 91.44,29.69 R21.1 | 89.5,27.15 89.38,27.15 IC4.5 | 68.26,28.57 81.57,28.57 86.75,23.4 87.4,23.4 90,26 90,26.65 89.5,27.15 | 68.26,28.57 64.29,28.57 IC3.5 | v78.9,50.32 78.9,62.07 84.77,67.94 U$1.JP2.3 | v39.85,25.08 37.62,25.08 | 68.26,28.57 v64.45,24.77
  Top 0.813: R21.1 91.65,30.45 91.88,30.68 92.5,31.3 95.94,31.3 LCD.3
  Bottom 0.152: v17.94,23.18 v16.03,25.08 | v78.9,50.32 83.5,45.72 83.5,39.05 v83.66,38.89 | v39.85,25.08 40.96,23.97 63.79,23.97 63.79,23.95 64.45,24.61 v64.45,24.77
SDA  (via drill 0.35)
  Top 0.152: v20.8,30.8 16.99,30.8 16.99,27.94 16.67,27.62 13.65,27.62 IC1.6 | v23.18,28.42 25.88,31.11 40.96,31.11 41.43,30.64 | 41.43,30.64 41.43,28.26 37.78,28.26 IC2.6 | 81.44,39.53 86.36,39.53 91.28,34.61 R22.1 | 81.44,39.53 80.64,39.53 IC6.20 | v74.14,32.23 73.18,31.27 | 73.18,31.27 71.28,29.37 64.45,29.37 64.29,29.21 IC3.6 | 81.44,39.53 v81.44,40.01 | v82.71,38.42 89.53,31.59 90.49,31.59 90.49,28.26 90.01,27.78 89.38,27.78 IC4.6 | U$1.JP2.4 87.47,68.1 88.74,69.37 98.13,69.37 98.9,68.6 98.9,33.71 LCD.4 | 41.43,30.64 41.91,31.11 v47.15,31.11 | 73.18,31.27 v57.15,31.27
  Top 0.813: R22.1 91.65,33.35 92.74,32.26 LCD.4
  Bottom 0.152: v23.18,28.42 v20.8,30.8 | v74.14,32.23 77.31,35.4 77.31,35.88 81.28,39.85 | 81.28,39.85 v82.71,38.42 | 81.28,39.85 v81.44,40.01 | v47.15,31.11 57.15,31.11 v57.15,31.27
USB_SUPPLY  (via drill 0.35)
  Top 0.406: IC2.1 33.52,29.48 v32.5,30.5 | v31.5,33.5 31.4,33.4 R10.2 | IC1.1 6.44,28.95 R9.2 | IC3.1 55.58,30.48 R11.2 | IC4.1 82.42,28.98 81.2,30.2 R14.2
  Top 0.813: D4.C 36,48.5 37.25,47.25
  Top 1.27: R9.2 9,33.4 R10.2 29.5,39.5 37.25,47.25 38.5,48.5 47.5,48.5 | 47.5,48.5 52.5,48.5 55.5,45.5 R11.2 55.5,32.5 56.5,33.5 67,33.5 | 67,33.5 77.9,33.5 81.2,30.2 | D3.C 47.5,48.5 | D2.A 67,33.5
  Bottom 0.406: v32.5,30.5 31.5,31.5 v31.5,33.5